# EAGLE board CAN_FB (EAGLE 4.09)
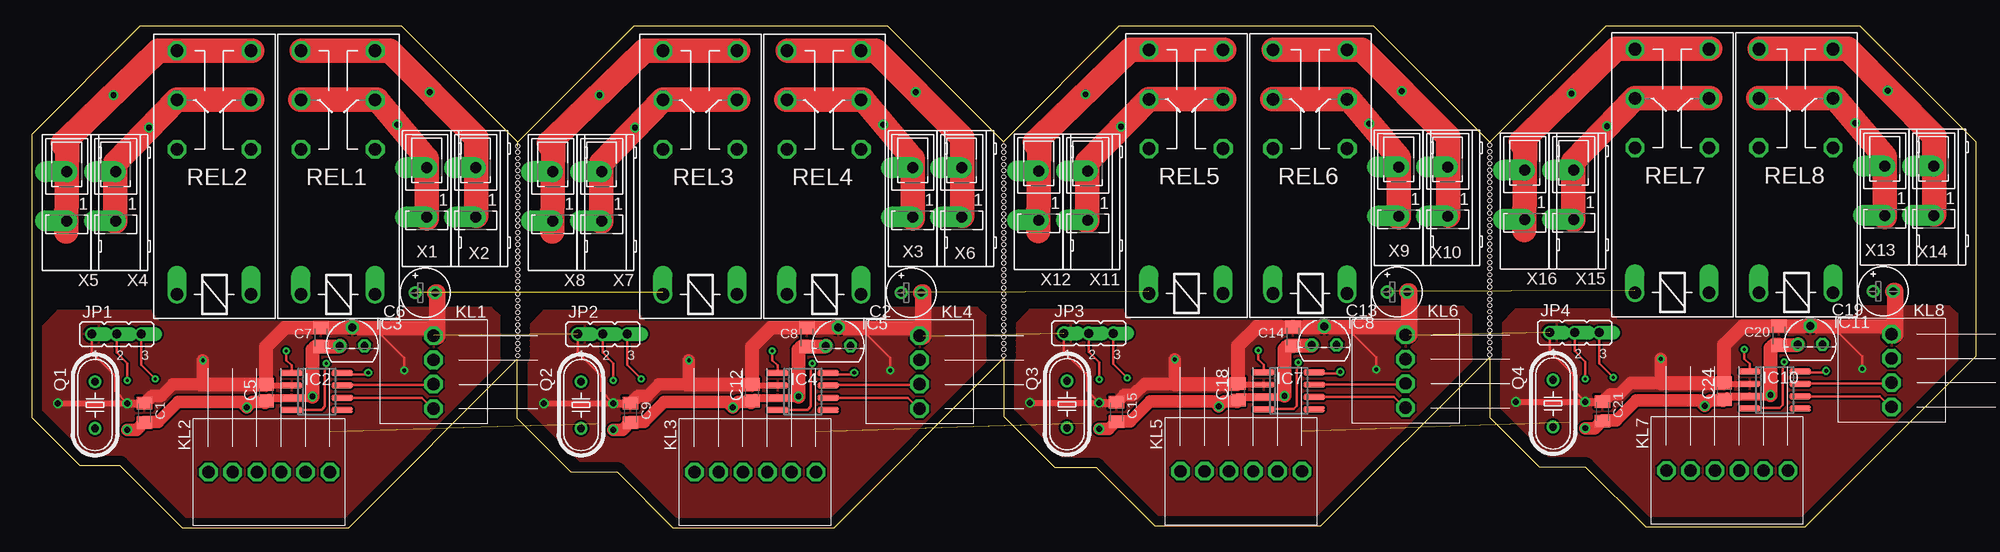
[diagram p0: board, top side]
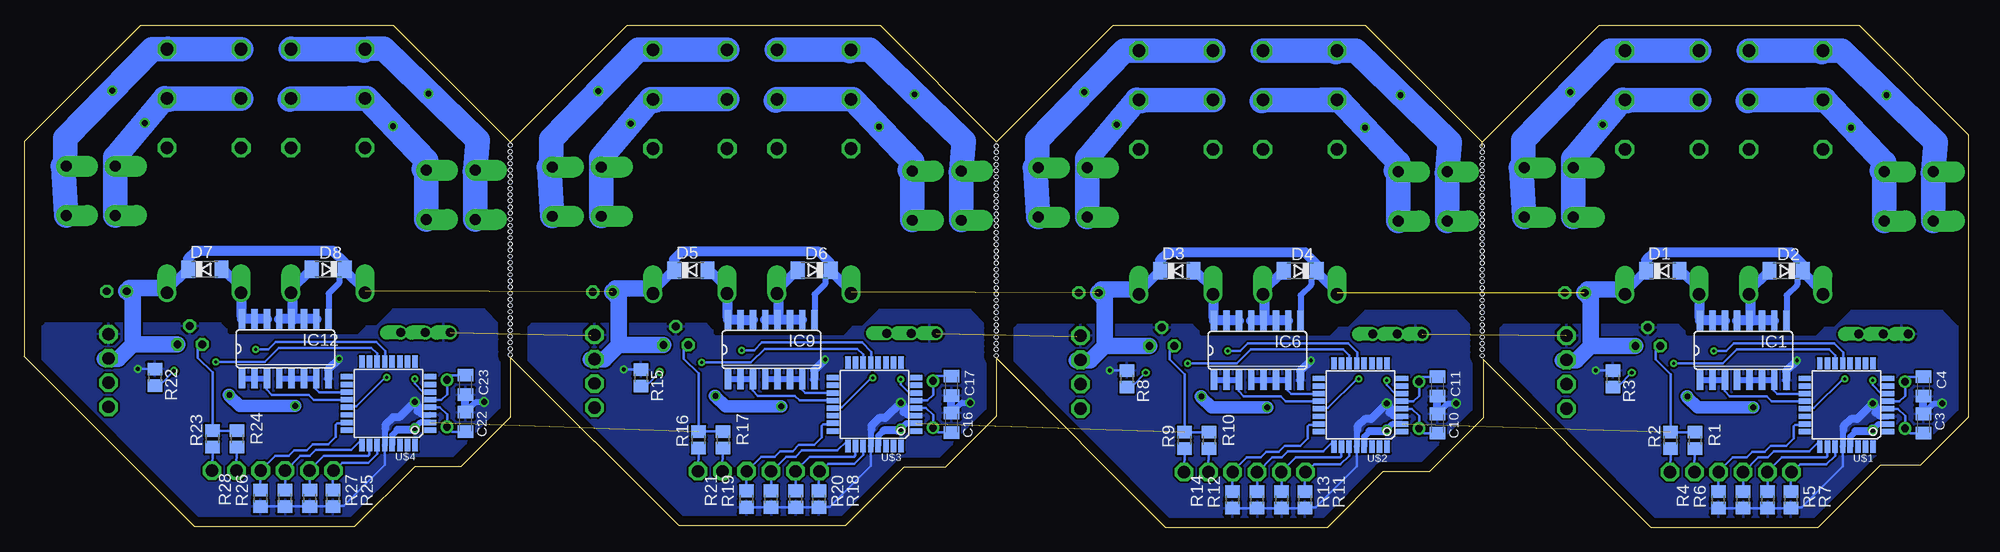
[diagram p1: board, bottom side, seen from below]

Size 200.03 x 51.67 mm. Coordinates in mm from the lower left corner, seen from the top.
Outline: 50.01,39.21 50.01,39.69 38.02,51.67 11.19,51.67 0,40.48 0,11.35 4.92,6.43 9.05,6.43 15.48,0
Outline: 50.01,39.69 61.99,51.67 88.03,51.67 100.01,39.69 100.01,39.77 111.92,51.67 138.03,51.67 150.02,39.69
Outline: 150.02,39.69 150.02,39.69
Outline: 150.02,39.69 162,51.67 188.12,51.67 200.03,39.77 200.03,17.62 182.48,0.08 166.05,0.08 159.86,6.27 155.1,6.27 150.02,11.35 150.02,17.54 132.64,0.16 115.57,0.16 109.54,6.19 105.25,6.19 100.01,11.43 100.01,17.46 82.55,0 65.96,0 60.25,5.71 55.48,5.71 49.93,11.27 49.93,17.3 32.62,0 15.48,0
Outline: 15.48,0 15.48,0
Copper layers used: Top, Bottom
Holes 0.41 mm at 50.01,26.59 50.01,25.96 50.01,27.23 50.01,27.86 50.01,28.5 50.01,29.13 50.01,29.77 50.01,30.4 50.01,31.04 50.01,31.67 50.01,32.94 50.01,32.31 50.01,33.58 50.01,34.21 50.01,34.85 50.01,35.48 50.01,36.12 50.01,36.75 50.01,37.39 50.01,38.02 50.01,39.29 50.01,38.66 50.01,18.34 50.01,18.97 50.01,20.24 50.01,19.61 50.01,20.88 50.01,21.51 50.01,22.15 50.01,22.78 50.01,23.42 50.01,24.05 50.01,24.69 50.01,25.32 100.01,26.59 100.01,25.96 100.01,27.23 100.01,27.86 100.01,28.5 100.01,29.13 100.01,29.77 100.01,30.4 100.01,31.04 100.01,31.67 100.01,32.94 100.01,32.31 100.01,33.58 100.01,34.21 100.01,34.85 100.01,35.48 100.01,36.12 100.01,36.75 100.01,37.39 100.01,38.02 100.01,39.29 100.01,38.66 100.01,18.34 100.01,18.97 100.01,20.24 100.01,19.61 100.01,20.88 100.01,21.51 100.01,22.15 100.01,22.78 100.01,23.42 100.01,24.05 100.01,24.69 100.01,25.32 150.02,26.67 150.02,26.04 150.02,27.3 150.02,27.94 150.02,28.57 150.02,29.21 150.02,29.84 150.02,30.48 150.02,31.11 150.02,31.75 150.02,33.02 150.02,32.38 150.02,33.66 150.02,34.29 150.02,34.92 150.02,35.56 150.02,36.2 150.02,36.83 150.02,37.47 150.02,38.1 150.02,39.37 150.02,38.73 150.02,17.78 150.02,18.41 150.02,19.05 150.02,20.32 150.02,19.68 150.02,20.95 150.02,21.59 150.02,22.23 150.02,22.86 150.02,23.5 150.02,24.13 150.02,24.77 150.02,25.4 50.01,17.7 100.01,17.7

## Footprints (pad centres in the part's own frame; a part is rotated, then mirrored left to right if it is on the bottom)
C0805K = smd 1.3 x 1.6: 1 -1,0; 2 1,0
E2-5 = drill 0.813 pad 1.27 round: + -1.016,0 | drill 0.813 pad 1.27 octagon: - 1.016,0
C0805 = smd 1.3 x 1.5: 1 -0.85,0; 2 0.85,0
SOD80C = smd 1.4 x 1.8: A 1.7,0; C -1.7,0
SO16 = smd 0.66 x 2.032: 1 -4.445,-3.073; 2 -3.175,-3.073; 3 -1.905,-3.073; 4 -0.635,-3.073; 5 0.635,-3.073; 6 1.905,-3.073; 7 3.175,-3.073; 8 4.445,-3.073; 9 4.445,3.073; 10 3.175,3.073; 11 1.905,3.073; 12 0.635,3.073; 13 -0.635,3.073; 14 -1.905,3.073; 15 -3.175,3.073; 16 -4.445,3.073
SO8 = smd 0.6 x 2.2: 1 -1.905,-2.6; 2 -0.635,-2.6; 3 0.635,-2.6; 4 1.905,-2.6; 5 1.905,2.6; 6 0.635,2.6; 7 -0.635,2.6; 8 -1.905,2.6
TO92 = drill 0.813 octagon: 1 -1.27,0; 2 0,1.905; 3 1.27,0
JP2 = drill 0.914 offset: 1 -2.54,0; 2 0,0; 3 2.54,0
AST021-04 = drill 1.27 octagon: P$1 0,0; P$2 0,2.5; P$3 0,5; P$4 0,7.5
AST021-06 = drill 1.27 octagon: P$1 0,0; P$2 0,2.5; P$3 0,5; P$4 0,7.5; P$5 0,10; P$6 0,12.5
HC49U-V = drill 0.813 round: 1 -2.413,0; 2 2.413,0
R0805 = smd 1.3 x 1.5: 1 -0.85,0; 2 0.85,0
FIN41 = drill 1.3 offset: 1 -10.16,3.81; 2 -10.16,-3.81 | drill 1.3 octagon: O1 4.763,-3.81; O2 4.763,3.81; P1 9.842,-3.81; P2 9.842,3.81; S1 14.922,-3.81; S2 14.922,3.81
LQFP32 = smd 1.27 x 0.559: 1 -4.293,2.743; 2 -4.293,1.956; 3 -4.293,1.168; 4 -4.293,0.381; 5 -4.293,-0.381; 6 -4.293,-1.168; 7 -4.293,-1.956; 8 -4.293,-2.743; 17 4.293,-2.743; 18 4.293,-1.956; 19 4.293,-1.168; 20 4.293,-0.381; 21 4.293,0.381; 22 4.293,1.168; 23 4.293,1.956; 24 4.293,2.743 | smd 0.559 x 1.27: 9 -2.743,-4.293; 10 -1.956,-4.293; 11 -1.168,-4.293; 12 -0.381,-4.293; 13 0.381,-4.293; 14 1.168,-4.293; 15 1.956,-4.293; 16 2.743,-4.293; 25 2.743,4.293; 26 1.956,4.293; 27 1.168,4.293; 28 0.381,4.293; 29 -0.381,4.293; 30 -1.168,4.293; 31 -1.956,4.293; 32 -2.743,4.293
W236-1 = drill 1.118 pad 2.184 offset: 1 0,-2.54; 2 0,2.54

## Placement (x,y rotation side)
C1  100nF  [C0805K]  11.59,11.82 90 top
C2  47µF / 25V  [E2-5]  90.5,24.18 0 top
C3  1pF  [C0805K]  4.61,10.71 270 bottom
C4  1pF  [C0805K]  4.61,14.52 90 bottom
C5  100nF  [C0805]  24.13,13.89 90 top
C6  47µF / 25V  [E2-5]  40.49,24.18 0 top
C7  100nF / 10V  [C0805K]  29.76,19.6 90 top
C8  100nF / 10V  [C0805K]  79.77,19.6 90 top
C9  100nF  [C0805K]  61.6,11.82 90 top
C10  1pF  [C0805K]  54.62,10.71 270 bottom
C11  1pF  [C0805K]  54.62,14.52 90 bottom
C12  100nF  [C0805]  74.14,13.89 90 top
C13  47µF / 25V  [E2-5]  140.5,24.26 0 top
C14  100nF / 10V  [C0805K]  129.77,19.68 90 top
C15  100nF  [C0805K]  111.61,11.9 90 top
C16  1pF  [C0805K]  104.62,10.79 270 bottom
C17  1pF  [C0805K]  104.62,14.6 90 bottom
C18  100nF  [C0805]  124.14,13.97 90 top
C19  47µF / 25V  [E2-5]  190.51,24.34 0 top
C20  100nF / 10V  [C0805K]  179.78,19.76 90 top
C21  100nF  [C0805K]  161.61,11.98 90 top
C22  1pF  [C0805K]  154.63,10.87 270 bottom
C23  1pF  [C0805K]  154.63,14.68 90 bottom
C24  100nF  [C0805]  174.15,14.05 90 top
D1  1N4148  [SOD80C]  31.43,26.43 0 bottom
D2  1N4148  [SOD80C]  18.73,26.43 180 bottom
D3  1N4148  [SOD80C]  81.44,26.43 0 bottom
D4  1N4148  [SOD80C]  68.74,26.43 180 bottom
D5  1N4148  [SOD80C]  131.45,26.51 0 bottom
D6  1N4148  [SOD80C]  118.75,26.51 180 bottom
D7  1N4148  [SOD80C]  181.45,26.59 0 bottom
D8  1N4148  [SOD80C]  168.75,26.59 180 bottom
IC1  ULN2003AD  [SO16]  23.14,18.25 0 bottom
IC2  PCA82C250T  [SO8]  29.34,14.01 270 top
IC3  7805L  [TO92]  32.97,18.71 0 top
IC4  PCA82C250T  [SO8]  79.35,14.01 270 top
IC5  7805L  [TO92]  82.98,18.71 0 top
IC6  ULN2003AD  [SO16]  73.15,18.25 0 bottom
IC7  PCA82C250T  [SO8]  129.35,14.09 270 top
IC8  7805L  [TO92]  132.99,18.79 0 top
IC9  ULN2003AD  [SO16]  123.15,18.33 0 bottom
IC10  PCA82C250T  [SO8]  179.36,14.16 270 top
IC11  7805L  [TO92]  182.99,18.87 0 top
IC12  ULN2003AD  [SO16]  173.16,18.41 0 bottom
JP1  [JP2]  8.73,19.92 0 top
JP2  [JP2]  58.74,19.92 0 top
JP3  [JP2]  108.74,20 0 top
JP4  [JP2]  158.75,20.08 0 top
KL1  AST021-04  [AST021-04]  41.35,19.76 180 top
KL2  AST021-06  [AST021-06]  18.18,5.71 270 top
KL3  AST021-06  [AST021-06]  68.18,5.71 270 top
KL4  AST021-04  [AST021-04]  91.36,19.76 180 top
KL5  AST021-06  [AST021-06]  118.19,5.79 270 top
KL6  AST021-04  [AST021-04]  141.37,19.84 180 top
KL7  AST021-06  [AST021-06]  168.2,5.87 270 top
KL8  AST021-04  [AST021-04]  191.37,19.92 180 top
Q1  6.00000  [HC49U-V]  6.51,12.62 270 top
Q2  6.00000  [HC49U-V]  56.52,12.62 270 top
Q3  6.00000  [HC49U-V]  106.53,12.7 270 top
Q4  6.00000  [HC49U-V]  156.53,12.78 270 top
R1  1k  [R0805]  28.1,8.97 90 bottom
R2  1k  [R0805]  30.64,8.97 90 bottom
R3  [R0805]  36.56,15.32 90 bottom
R4  100k  [R0805]  25.72,2.86 90 bottom
R5  100k  [R0805]  23.18,2.86 90 bottom
R6  100k  [R0805]  20.64,2.86 90 bottom
R7  100k  [R0805]  18.26,2.86 90 bottom
R8  [R0805]  86.57,15.32 90 bottom
R9  1k  [R0805]  80.65,8.97 90 bottom
R10  1k  [R0805]  78.11,8.97 90 bottom
R11  100k  [R0805]  68.26,2.86 90 bottom
R12  100k  [R0805]  70.64,2.86 90 bottom
R13  100k  [R0805]  73.18,2.86 90 bottom
R14  100k  [R0805]  75.72,2.86 90 bottom
R15  [R0805]  136.58,15.4 90 bottom
R16  1k  [R0805]  130.65,9.05 90 bottom
R17  1k  [R0805]  128.11,9.05 90 bottom
R18  100k  [R0805]  118.27,2.94 90 bottom
R19  100k  [R0805]  120.65,2.94 90 bottom
R20  100k  [R0805]  123.19,2.94 90 bottom
R21  100k  [R0805]  125.73,2.94 90 bottom
R22  [R0805]  186.58,15.48 90 bottom
R23  1k  [R0805]  180.66,9.13 90 bottom
R24  1k  [R0805]  178.12,9.13 90 bottom
R25  100k  [R0805]  168.28,3.02 90 bottom
R26  100k  [R0805]  170.66,3.02 90 bottom
R27  100k  [R0805]  173.2,3.02 90 bottom
R28  100k  [R0805]  175.74,3.02 90 bottom
REL1  FIN41.61  [FIN41]  31.52,34.19 90 top
REL2  FIN41.61  [FIN41]  18.76,34.19 90 top
REL3  FIN41.61  [FIN41]  68.76,34.19 90 top
REL4  FIN41.61  [FIN41]  81.52,34.19 90 top
REL5  FIN41.61  [FIN41]  118.77,34.27 90 top
REL6  FIN41.61  [FIN41]  131.53,34.27 90 top
REL7  FIN41.61  [FIN41]  168.78,34.35 90 top
REL8  FIN41.61  [FIN41]  181.53,34.35 90 top
U$1  MC9S08DZ16CLC  [LQFP32]  12.54,12.62 180 bottom
U$2  MC9S08DZ16CLC  [LQFP32]  62.54,12.62 180 bottom
U$3  MC9S08DZ16CLC  [LQFP32]  112.55,12.7 180 bottom
U$4  MC9S08DZ16CLC  [LQFP32]  162.55,12.78 180 bottom
X1  W236-1  [W236-1]  40.65,34.52 180 top
X2  W236-1  [W236-1]  45.68,34.52 180 top
X3  W236-1  [W236-1]  90.65,34.52 180 top
X4  W236-1  [W236-1]  8.64,34.11 180 top
X5  W236-1  [W236-1]  3.6,34.11 180 top
X6  W236-1  [W236-1]  95.69,34.52 180 top
X7  W236-1  [W236-1]  58.64,34.11 180 top
X8  W236-1  [W236-1]  53.61,34.11 180 top
X9  W236-1  [W236-1]  140.66,34.6 180 top
X10  W236-1  [W236-1]  145.69,34.6 180 top
X11  W236-1  [W236-1]  108.65,34.19 180 top
X12  W236-1  [W236-1]  103.62,34.19 180 top
X13  W236-1  [W236-1]  190.67,34.68 180 top
X14  W236-1  [W236-1]  195.7,34.68 180 top
X15  W236-1  [W236-1]  158.66,34.27 180 top
X16  W236-1  [W236-1]  153.62,34.27 180 top

## Library data of the parts
C1-C24 R1-R28 = rcl
D1-D8 = diode
IC1 IC6 IC9 IC12 = uln-udn
IC2 IC4 IC7 IC10 = micro-philips
IC3 IC5 IC8 IC11 = linear
JP1-JP4 = jumper
KL1-KL8 = con-ria
Q1-Q4 = crystal
REL1-REL8 = relay
U$1-U$4 = MC9S08DZ16CLC
X1-X16 = con-wago-508

## Nets
+5V: C1.1 C5.1 C7.1 C8.1 C9.1 C12.1 C14.1 C15.1 C18.1 C20.1 C21.1 C24.1 IC2.3 IC3.1 IC4.3 IC5.1 IC7.3 IC8.1 IC10.3 IC11.1 R1.2 R2.2 R9.2 R10.2 R16.2 R17.2 R23.2 R24.2 U$1.2 U$1.29 U$2.2 U$2.29 U$3.2 U$3.29 U$4.2 U$4.29
+12V: C2.+ C6.+ C13.+ C19.+ D1.C D2.C D3.C D4.C D5.C D6.C D7.C D8.C IC1.9 IC3.3 IC5.3 IC6.9 IC8.3 IC9.9 IC11.3 IC12.9 KL1.P$2 KL4.P$2 KL6.P$2 KL8.P$2 REL1.2 REL2.1 REL3.1 REL4.2 REL5.1 REL6.2 REL7.1 REL8.2
GND: C1.2 C2.- C3.1 C4.1 C5.2 C6.- C7.2 C8.2 C9.2 C10.1 C11.1 C12.2 C13.- C14.2 C15.2 C16.1 C17.1 C18.2 C19.- C20.2 C21.2 C22.1 C23.1 C24.2 IC1.8 IC2.2 IC3.2 IC4.2 IC5.2 IC6.8 IC7.2 IC8.2 IC9.8 IC10.2 IC11.2 IC12.8 JP1.1 JP2.1 JP3.1 JP4.1 KL1.P$1 KL4.P$1 KL6.P$1 KL8.P$1 R3.2 R4.1 R5.1 R6.1 R7.1 R8.2 R11.1 R12.1 R13.1 R14.1 R15.2 R18.1 R19.1 R20.1 R21.1 R22.2 R25.1 R26.1 R27.1 R28.1 U$1.3 U$1.28 U$2.3 U$2.28 U$3.3 U$3.28 U$4.3 U$4.28
N$1: IC2.1 U$1.13
N$2: IC2.4 U$1.14
N$3: IC2.8 R3.1
N$4: IC2.6 KL1.P$4
N$5: KL2.P$5 R1.1
N$6: D1.A IC1.14 IC1.15 IC1.16 REL1.1
N$7: IC2.7 KL1.P$3
N$8: D2.A IC1.10 IC1.11 IC1.12 IC1.13 REL2.2
N$9: C4.2 Q1.1 U$1.5
N$10: C3.2 Q1.2 U$1.4
N$11: IC1.1 IC1.2 IC1.3 U$1.20
N$12: IC1.4 IC1.5 IC1.6 IC1.7 U$1.19
N$13: KL2.P$4 R4.2 U$1.23
N$14: KL2.P$3 R5.2 U$1.25
N$15: KL2.P$2 R6.2 U$1.26
N$16: REL1.S1 REL1.S2 X2.1 X2.2
N$17: KL2.P$1 R7.2 U$1.27
N$18: REL1.P1 REL1.P2 X1.1 X1.2
N$19: KL2.P$6 R2.1
N$20: IC4.1 U$2.13
N$21: JP1.2 U$1.6
N$22: JP1.3 U$1.21
N$23: IC4.4 U$2.14
N$24: IC4.8 R8.1
N$25: REL2.P1 REL2.P2 X4.1 X4.2
N$26: REL2.S1 REL2.S2 X5.1 X5.2
N$27: IC4.7 KL4.P$3
N$28: IC4.6 KL4.P$4
N$29: C11.2 Q2.1 U$2.5
N$30: C10.2 Q2.2 U$2.4
N$31: IC6.1 IC6.2 IC6.3 U$2.20
N$32: IC6.4 IC6.5 IC6.6 IC6.7 U$2.19
N$33: REL4.S1 REL4.S2 X6.1 X6.2
N$34: REL4.P1 REL4.P2 X3.1 X3.2
N$35: REL3.P1 REL3.P2 X7.1 X7.2
N$36: REL3.S1 REL3.S2 X8.1 X8.2
N$37: D3.A IC6.14 IC6.15 IC6.16 REL4.1
N$38: D4.A IC6.10 IC6.11 IC6.12 IC6.13 REL3.2
N$39: KL3.P$4 R14.2 U$2.23
N$40: KL3.P$3 R13.2 U$2.25
N$41: KL3.P$2 R12.2 U$2.26
N$42: KL3.P$1 R11.2 U$2.27
N$43: KL3.P$5 R10.1
N$44: KL3.P$6 R9.1
N$45: JP2.2 U$2.6
N$46: JP2.3 U$2.21
N$47: IC7.1 U$3.13
N$48: IC7.4 U$3.14
N$49: IC7.8 R15.1
N$50: IC7.7 KL6.P$3
N$51: IC7.6 KL6.P$4
N$52: C17.2 Q3.1 U$3.5
N$53: C16.2 Q3.2 U$3.4
N$54: IC9.1 IC9.2 IC9.3 U$3.20
N$55: IC9.4 IC9.5 IC9.6 IC9.7 U$3.19
N$56: REL6.S1 REL6.S2 X10.1 X10.2
N$57: REL6.P1 REL6.P2 X9.1 X9.2
N$58: REL5.P1 REL5.P2 X11.1 X11.2
N$59: REL5.S1 REL5.S2 X12.1 X12.2
N$60: D5.A IC9.14 IC9.15 IC9.16 REL6.1
N$61: D6.A IC9.10 IC9.11 IC9.12 IC9.13 REL5.2
N$62: KL5.P$4 R21.2 U$3.23
N$63: KL5.P$3 R20.2 U$3.25
N$64: KL5.P$2 R19.2 U$3.26
N$65: KL5.P$1 R18.2 U$3.27
N$66: KL5.P$5 R17.1
N$67: KL5.P$6 R16.1
N$68: JP3.2 U$3.6
N$69: JP3.3 U$3.21
N$70: IC10.1 U$4.13
N$71: IC10.4 U$4.14
N$72: IC10.8 R22.1
N$73: IC10.7 KL8.P$3
N$74: IC10.6 KL8.P$4
N$75: C23.2 Q4.1 U$4.5
N$76: C22.2 Q4.2 U$4.4
N$77: IC12.1 IC12.2 IC12.3 U$4.20
N$78: IC12.4 IC12.5 IC12.6 IC12.7 U$4.19
N$79: REL8.S1 REL8.S2 X14.1 X14.2
N$80: REL8.P1 REL8.P2 X13.1 X13.2
N$81: REL7.P1 REL7.P2 X15.1 X15.2
N$82: REL7.S1 REL7.S2 X16.1 X16.2
N$83: D7.A IC12.14 IC12.15 IC12.16 REL8.1
N$84: D8.A IC12.10 IC12.11 IC12.12 IC12.13 REL7.2
N$85: KL7.P$4 R28.2 U$4.23
N$86: KL7.P$3 R27.2 U$4.25
N$87: KL7.P$2 R26.2 U$4.26
N$88: KL7.P$1 R25.2 U$4.27
N$89: KL7.P$5 R24.1
N$90: KL7.P$6 R23.1
N$91: JP4.2 U$4.6
N$92: JP4.3 U$4.21

## Tracks (layer width: path | path; a pad name or v marks a point on that pad's centre or on a via)
+5V  (via drill 0.61)  (3 unrouted)
  Top 0.61: 24.4,13.37 24.13,13.1 C5.1 | 74.41,13.37 74.14,13.1 C12.1 | 124.42,13.45 124.14,13.18 C18.1 | 174.42,13.53 174.15,13.26 C24.1
  Top 0.813: 24.4,13.37 IC2.3 28.89,13.37 28.89,13.41 | 74.41,13.37 IC4.3 78.9,13.37 78.9,13.41 | 124.42,13.45 IC7.3 128.91,13.45 128.91,13.49 | 174.42,13.53 IC10.3 178.91,13.53 178.91,13.57
  Top 1.27: 11.59,10.87 10.79,10.08 v9.84,10.08 | 11.59,10.87 C1.1 | 11.59,10.87 13.01,10.87 15.08,12.94 17.46,12.94 21.59,12.94 v22.15,12.38 22.7,12.94 24.03,12.94 | 28.89,13.41 v28.89,13.49 | 28.89,18.26 28.81,18.34 | 61.6,10.87 61.59,10.87 60.8,10.08 v59.85,10.08 | 61.6,10.87 C9.1 | 61.6,10.87 63.02,10.87 65.09,12.94 67.47,12.94 | 67.47,12.94 | 67.47,12.94 71.6,12.94 v72.15,12.38 72.71,12.94 74.03,12.94 | 78.9,13.41 v78.9,13.49 | 78.9,18.26 78.82,18.34 | 111.61,10.95 111.6,10.95 110.81,10.16 v109.86,10.16 | 111.61,10.95 C15.1 | 111.61,10.95 113.03,10.95 115.09,13.02 117.47,13.02 121.6,13.02 v122.16,12.46 122.71,13.02 124.04,13.02 | 128.91,13.49 v128.91,13.57 | 128.91,18.34 128.83,18.41 | 161.61,11.03 160.81,10.24 v159.86,10.24 | 161.61,11.03 C21.1 | 161.61,11.03 163.03,11.03 165.1,13.1 167.48,13.1 | 167.48,13.1 | 167.48,13.1 171.61,13.1 v172.16,12.54 172.72,13.1 174.05,13.1 | 178.91,13.57 v178.91,13.65 | 178.91,18.41 178.83,18.49
  Top 1.422: 24.03,12.94 C5.1 | v28.89,13.49 28.89,18.26 29.29,18.65 29.77,18.65 | 29.77,18.65 C7.1 | IC3.1 31.7,18.68 31.67,18.65 29.77,18.65 | 74.03,12.94 C12.1 | v78.9,13.49 78.9,18.26 79.3,18.65 79.77,18.65 | 79.77,18.65 C8.1 | IC5.1 81.71,18.68 81.68,18.65 79.77,18.65 | 124.04,13.02 C18.1 | v128.91,13.57 128.91,18.34 129.3,18.73 129.78,18.73 | 129.78,18.73 C14.1 | IC8.1 131.72,18.77 131.68,18.73 129.78,18.73 | 174.05,13.1 C24.1 | v178.91,13.65 178.91,18.41 179.31,18.81 179.78,18.81 | 179.78,18.81 C20.1 | IC11.1 181.72,18.84 181.69,18.81 179.78,18.81
  Bottom 0.254: 30.64,9.84 | 30.64,9.84 R2.2 | 30.64,9.84 30.62,9.82 R1.2 R2.2 | R2.2 30.64,15.8 32.15,17.3 32.15,18.65 32.18,18.68 IC3.1 | 80.64,9.84 | 80.64,9.84 R9.2 | 80.64,9.84 80.62,9.82 R10.2 R9.2 | R9.2 80.64,15.8 82.15,17.3 82.15,18.65 82.19,18.68 IC5.1 | 130.65,9.92 | 130.65,9.92 R16.2 | 130.65,9.92 130.63,9.9 R17.2 R16.2 | R16.2 130.65,15.88 132.16,17.38 132.16,18.73 132.19,18.77 IC8.1 | 180.66,10 | 180.66,10 R23.2 | 180.66,10 180.63,9.98 R24.2 R23.2 | R23.2 180.66,15.95 182.17,17.46 182.17,18.81 182.2,18.84 IC11.1
  Bottom 0.61: U$1.2 9.26,10.66 v9.84,10.08 | U$1.29 12.15,9.36 11.59,9.92 | U$2.2 59.27,10.66 v59.85,10.08 | U$2.29 62.16,9.36 61.59,9.92 | U$3.2 109.28,10.74 v109.86,10.16 | U$3.29 112.17,9.44 111.6,10 | U$4.2 159.28,10.82 v159.86,10.24 | U$4.29 162.17,9.52 161.61,10.08
  Bottom 0.813: 11.59,9.92 10.16,9.92 9.84,10.24 v9.84,10.08 | 61.59,9.92 60.17,9.92 59.85,10.24 v59.85,10.08 | 111.6,10 110.17,10 109.86,10.32 v109.86,10.16 | 161.61,10.08 160.18,10.08 159.86,10.4 v159.86,10.24
  Bottom 1.27: v22.15,12.38 27.86,12.38 28.89,13.41 | v28.89,13.49 28.97,13.49 | v72.15,12.38 77.87,12.38 78.9,13.41 | v78.9,13.49 78.98,13.49 | v122.16,12.46 127.87,12.46 128.91,13.49 | v128.91,13.57 128.98,13.57 | v172.16,12.54 177.88,12.54 178.91,13.57 | v178.91,13.65 178.99,13.65
+12V  (3 unrouted)
  Bottom 0.254: 41.75,17.22 KL1.P$2 | 91.76,17.22 KL4.P$2 | 141.76,17.3 KL6.P$2 | 191.77,17.38 KL8.P$2
  Bottom 0.61: IC1.9 18.7,23.93 17.62,25 17.62,25.8 17.1,26.32 17.03,26.32 | 14.92,23.89 14.95,23.92 REL2.1 | IC6.9 68.7,23.93 67.63,25 67.63,25.8 67.11,26.32 67.04,26.32 | 64.93,23.89 64.95,23.92 REL3.1 | IC9.9 118.71,24.01 117.63,25.08 117.63,25.88 117.11,26.4 117.05,26.4 | 114.94,23.97 114.96,24 REL5.1 | IC12.9 168.71,24.09 167.64,25.16 167.64,25.96 167.12,26.48 167.05,26.48 | 164.94,24.05 164.97,24.08 REL7.1
  Bottom 1.016: REL1.2 35.33,24.29 33.18,26.43 | 33.18,26.43 D1.C | 33.18,26.43 33.18,27.54 32.38,28.34 18.26,28.34 17.03,27.11 D2.C 17.03,26.32 14.95,24.23 REL2.1 | REL4.2 85.33,24.29 83.19,26.43 | 83.19,26.43 D3.C | 83.19,26.43 83.19,27.54 82.39,28.34 68.26,28.34 67.04,27.11 D4.C 67.04,26.32 64.95,24.23 REL3.1 | REL6.2 135.34,24.36 133.19,26.51 | 133.19,26.51 D5.C | 133.19,26.51 133.19,27.62 132.4,28.42 118.27,28.42 117.05,27.19 D6.C 117.05,26.4 114.96,24.31 REL5.1 | REL8.2 185.34,24.44 183.2,26.59 | 183.2,26.59 D7.C | 183.2,26.59 183.2,27.7 182.4,28.5 168.28,28.5 167.05,27.27 D8.C 167.05,26.48 164.97,24.39 REL7.1
  Bottom 1.676: 35.83,24.53 35.57,24.53 35.33,24.29 | REL1.2 35.83,24.53 | 35.83,24.53 39.21,24.53 39.53,24.21 | 38.83,18.71 IC3.3 | 38.83,18.71 40.32,17.22 41.75,17.22 | 39.53,24.21 39.5,24.18 C6.+ | 38.83,18.71 38.83,23.51 39.53,24.21 | 85.83,24.53 85.57,24.53 85.33,24.29 | REL4.2 85.83,24.53 | 85.83,24.53 89.22,24.53 89.53,24.21 | 88.84,18.71 IC5.3 | 88.84,18.71 90.33,17.22 91.76,17.22 | 89.53,24.21 89.5,24.18 C2.+ | 88.84,18.71 88.84,23.51 89.53,24.21 | 135.84,24.61 135.58,24.61 135.34,24.36 | REL6.2 135.84,24.61 | 135.84,24.61 139.22,24.61 139.54,24.29 | 138.84,18.79 IC8.3 | 138.84,18.79 140.34,17.3 141.76,17.3 | 139.54,24.29 139.51,24.26 C13.+ | 138.84,18.79 138.84,23.59 139.54,24.29 | 185.84,24.69 185.59,24.69 185.34,24.44 | REL8.2 185.84,24.69 | 185.84,24.69 189.23,24.69 189.55,24.37 | 188.85,18.87 IC11.3 | 188.85,18.87 190.34,17.38 191.77,17.38 | 189.55,24.37 189.52,24.34 C19.+ | 188.85,18.87 188.85,23.67 189.55,24.37
GND  (via drill 0.41, 0.61)  (3 unrouted)
  Top 0.254: JP1.1 6.19,18.02 8.57,15.64 8.57,14.05 v9.84,12.78 | 33.5,20.56 33.42,20.64 35.16,20.64 38.34,17.46 v38.34,16.19 | JP2.1 56.2,18.02 58.58,15.64 58.58,14.05 v59.85,12.78 | 83.5,20.56 83.42,20.64 85.17,20.64 88.34,17.46 v88.34,16.19 | JP3.1 106.2,18.1 108.58,15.72 108.58,14.13 v109.86,12.86 | 133.51,20.64 133.43,20.72 135.18,20.72 138.35,17.54 v138.35,16.27 | JP4.1 156.21,18.18 158.59,15.8 158.59,14.21 v159.86,12.94 | 183.51,20.72 183.44,20.8 185.18,20.8 188.36,17.62 v188.36,16.35
  Top 0.61: IC2.2 24.17,14.64 24.13,14.68 C5.2 | v2.7,12.78 v9.84,12.78 | IC4.2 74.18,14.64 74.14,14.68 C12.2 | v52.7,12.78 v59.85,12.78 | IC7.2 124.19,14.72 124.14,14.76 C18.2 | v102.71,12.86 v109.86,12.86 | IC10.2 174.19,14.8 174.15,14.84 C24.2 | v152.72,12.94 v159.86,12.94
  Top 0.813: C1.2 11.59,12.78 v9.84,12.78 | C9.2 61.6,12.78 61.59,12.78 v59.85,12.78 | C15.2 111.61,12.86 111.6,12.86 v109.86,12.86 | C21.2 161.61,12.94 v159.86,12.94
  Top 1.27: v17.62,17.22 17.62,15 17.41,14.79 17.41,14.74 14.5,14.74 13.34,13.57 12.38,13.57 11.63,12.82 C1.2 | v67.63,17.22 67.63,15 67.41,14.79 67.41,14.74 64.51,14.74 63.34,13.57 62.39,13.57 61.64,12.82 C9.2 | v117.63,17.3 117.63,15.08 117.42,14.87 117.42,14.82 114.52,14.82 113.35,13.65 112.39,13.65 111.64,12.9 C15.2 | v167.64,17.38 167.64,15.16 167.43,14.95 167.43,14.9 164.52,14.9 163.35,13.73 162.4,13.73 161.65,12.98 C21.2
  Top 1.422: 17.41,14.74 C5.2 24.13,18.65 26.08,20.6 C7.2 33.45,20.6 | 33.45,20.6 33.45,20.61 IC3.2 | 33.45,20.6 33.5,20.56 40.88,20.56 41.75,19.68 | 67.41,14.74 C12.2 74.14,18.65 76.08,20.6 C8.2 83.46,20.6 | 83.46,20.6 83.45,20.61 IC5.2 | 83.46,20.6 83.5,20.56 90.89,20.56 91.76,19.68 | 117.42,14.82 C18.2 124.14,18.73 126.09,20.68 C14.2 133.47,20.68 | 133.47,20.68 133.46,20.68 IC8.2 | 133.47,20.68 133.51,20.64 140.89,20.64 141.76,19.76 | 167.43,14.9 C24.2 174.15,18.81 176.1,20.76 C20.2 183.47,20.76 | 183.47,20.76 IC11.2 | 183.47,20.76 183.51,20.72 190.9,20.72 191.77,19.84
  Top 1.676: C6.- 41.56,24.18 41.59,24.21 41.75,24.21 41.75,19.68 KL1.P$1 | C2.- 91.57,24.18 91.6,24.21 91.76,24.21 91.76,19.68 KL4.P$1 | C13.- 141.57,24.26 141.6,24.29 141.76,24.29 141.76,19.76 KL6.P$1 | C19.- 191.58,24.34 191.61,24.37 191.77,24.37 191.77,19.84 KL8.P$1
  Bottom 0.254: U$1.28 12.92,6.29 17.14,2.06 18.1,2.06 18.26,1.91 R7.1 20.58,2.01 20.64,2.06 R6.1 23.12,2.01 23.18,2.06 R5.1 25.66,2.01 25.72,2.06 | 25.72,2.06 | 25.72,2.06 R4.1 | R3.2 36.59,16.19 v38.34,16.19 | U$2.28 62.92,6.29 67.15,2.06 68.1,2.06 68.26,1.91 R11.1 70.59,2.01 70.64,2.06 | 70.64,2.06 | 70.64,2.06 R12.1 73.13,2.01 73.18,2.06 R13.1 75.67,2.01 75.72,2.06 | 75.72,2.06 | 75.72,2.06 R14.1 | R8.2 86.6,16.19 v88.34,16.19 | U$3.28 112.93,6.37 117.16,2.14 118.11,2.14 118.27,1.98 R18.1 120.59,2.09 120.65,2.14 | 120.65,2.14 | 120.65,2.14 R19.1 123.13,2.09 123.19,2.14 R20.1 125.67,2.09 125.73,2.14 | 125.73,2.14 | 125.73,2.14 R21.1 | R15.2 136.6,16.27 v138.35,16.27 | U$4.28 162.94,6.45 167.16,2.22 168.12,2.22 168.28,2.06 R25.1 170.6,2.17 170.66,2.22 | 170.66,2.22 | 170.66,2.22 R26.1 173.14,2.17 173.2,2.22 R27.1 175.68,2.17 175.74,2.22 R28.1 | R22.2 186.61,16.35 v188.36,16.35
  Bottom 0.61: IC1.8 18.72,15.18 18.73,15.16 | U$1.3 9.15,11.45 9.53,11.83 | U$1.28 12.92,10.02 12.86,10.08 | C3.1 3.54,12.78 v2.7,12.78 | IC6.8 68.72,15.18 68.74,15.16 | U$2.3 59.15,11.45 59.53,11.83 | U$2.28 62.92,10.02 62.87,10.08 | C10.1 53.55,12.78 v52.7,12.78 | IC9.8 118.73,15.25 118.75,15.24 | U$3.3 109.16,11.53 109.54,11.91 | U$3.28 112.93,10.1 112.87,10.16 | C16.1 103.56,12.86 v102.71,12.86 | IC12.8 168.74,15.33 168.75,15.32 | U$4.3 159.16,11.61 159.54,11.99 | U$4.28 162.94,10.18 162.88,10.24 | C22.1 153.56,12.94 v152.72,12.94
  Bottom 0.813: 4.6,13.41 4.61,13.41 C3.1 4.61,13.57 | 4.61,13.57 C4.1 | 4.61,13.57 4.6,13.57 | 9.53,11.83 9.53,12.46 v9.84,12.78 11.43,11.19 12.06,11.19 12.86,10.4 12.86,10.08 | 18.73,15.16 18.73,16.11 v17.62,17.22 | 54.61,13.41 54.62,13.41 C10.1 54.62,13.57 | 54.62,13.57 C11.1 | 54.62,13.57 54.61,13.57 | 59.53,11.83 59.53,12.46 v59.85,12.78 61.44,11.19 62.07,11.19 62.87,10.4 62.87,10.08 | 68.74,15.16 68.74,16.11 v67.63,17.22 | 104.62,13.49 C16.1 104.62,13.65 | 104.62,13.65 C17.1 | 104.62,13.65 | 109.54,11.91 109.54,12.54 v109.86,12.86 111.44,11.27 112.08,11.27 112.87,10.48 112.87,10.16 | 118.75,15.24 118.75,16.19 v117.63,17.3 | 154.62,13.57 154.63,13.57 C22.1 154.63,13.73 | 154.63,13.73 C23.1 | 154.63,13.73 154.62,13.73 | 159.54,11.99 159.54,12.62 v159.86,12.94 161.45,11.35 162.08,11.35 162.88,10.56 162.88,10.24 | 168.75,15.32 168.75,16.27 v167.64,17.38
  pour Bottom: 2.7,22.3 12.06,22.3 13.81,20.56 14.76,20.56 15.72,19.61 28.89,19.61 29.21,19.92 29.21,20.24 29.84,20.88 47.78,20.88 48.1,20.56 48.1,15.32 40.96,8.18 40.96,6.27 34.77,0.08 32.23,0.08 31.04,0 17.54,0 16.27,0 15.48,0 13.02,2.46 11.91,2.46 9.21,5.16 7.94,5.16 4.6,8.49 4.6,8.65 1.11,12.14 1.11,20.72
  pour Top: 1.11,20.72 2.7,22.3 12.22,22.3 12.22,22.15 13.18,21.19 36.99,21.19 38.42,22.62 47.31,22.62 48.1,21.83 48.1,15.32 40.96,8.18 40.96,6.11 40.8,6.11 34.77,0.08 15.4,0.08 15.24,0.24 15.24,0.24 13.18,2.3 13.02,2.3 12.86,2.46 11.75,2.46 11.75,2.62 9.21,5.16 7.94,5.16 7.94,5.32 1.11,12.14
  pour Bottom: 52.71,22.3 62.07,22.3 63.82,20.56 64.77,20.56 65.72,19.61 78.9,19.61 79.22,19.92 79.22,20.24 79.85,20.88 97.79,20.88 98.11,20.56 98.11,15.32 90.96,8.18 90.96,6.27 84.77,0.08 82.23,0.08 81.04,0 67.55,0 66.28,0 65.48,0 63.02,2.46 61.91,2.46 59.21,5.16 57.94,5.16 54.61,8.49 54.61,8.65 51.12,12.14 51.12,20.72
  pour Top: 51.12,20.72 52.71,22.3 62.23,22.3 62.23,22.15 63.18,21.19 87,21.19 88.42,22.62 97.31,22.62 98.11,21.83 98.11,15.32 90.96,8.18 90.96,6.11 90.81,6.11 84.77,0.08 65.41,0.08 65.25,0.24 65.25,0.24 63.18,2.3 63.02,2.3 62.87,2.46 61.75,2.46 61.75,2.62 59.21,5.16 57.94,5.16 57.94,5.32 51.12,12.14
  pour Bottom: 102.71,22.38 112.08,22.38 113.82,20.64 114.78,20.64 115.73,19.68 128.91,19.68 129.22,20 129.22,20.32 129.86,20.95 147.8,20.95 148.11,20.64 148.11,15.4 140.97,8.26 140.97,6.35 134.78,0.16 132.24,0.16 131.05,0.08 117.55,0.08 116.28,0.08 115.49,0.08 113.03,2.54 111.92,2.54 109.22,5.24 107.95,5.24 104.62,8.57 104.62,8.73 101.12,12.22 101.12,20.8
  pour Top: 101.12,20.8 102.71,22.38 112.24,22.38 112.24,22.23 113.19,21.27 137,21.27 138.43,22.7 147.32,22.7 148.11,21.91 148.11,15.4 140.97,8.26 140.97,6.19 140.81,6.19 134.78,0.16 115.41,0.16 115.25,0.32 115.25,0.32 113.19,2.38 113.03,2.38 112.87,2.54 111.76,2.54 111.76,2.7 109.22,5.24 107.95,5.24 107.95,5.4 101.12,12.22
  pour Bottom: 152.72,22.46 162.08,22.46 163.83,20.72 164.78,20.72 165.74,19.76 178.91,19.76 179.23,20.08 179.23,20.4 179.86,21.03 197.8,21.03 198.12,20.72 198.12,15.48 190.98,8.33 190.98,6.43 184.79,0.24 182.25,0.24 181.05,0.16 167.56,0.16 166.29,0.16 165.5,0.16 163.04,2.62 161.93,2.62 159.23,5.32 157.96,5.32 154.62,8.65 154.62,8.81 151.13,12.3 151.13,20.88
  pour Top: 151.13,20.88 152.72,22.46 162.24,22.46 162.24,22.3 163.2,21.35 187.01,21.35 188.44,22.78 197.33,22.78 198.12,21.99 198.12,15.48 190.98,8.33 190.98,6.27 190.82,6.27 184.78,0.24 165.42,0.24 165.26,0.4 165.26,0.4 163.2,2.46 163.04,2.46 162.88,2.62 161.77,2.62 161.77,2.78 159.23,5.32 157.96,5.32 157.96,5.48 151.13,12.3
N$1  (via drill 0.3)
  Top 0.254: IC2.1 26.74,16.68 26.19,17.22 v26.19,18.18
  Bottom 0.254: 13.02,16.91 | U$1.13 13.02,16.91 | 13.02,16.91 12.86,17.07 12.86,16.91 | v26.19,18.18 24.92,18.18 24.13,18.97 13.81,18.97 12.86,18.02 12.86,16.91 | 12.86,16.91
N$2  (via drill 0.3)
  Top 0.254: v30.32,16.91 30.32,16.43 30.16,16.27 30.16,12.46 29.84,12.14 26.67,12.14 26.71,12.1 IC2.4
  Bottom 0.254: v30.32,16.91 30.16,16.75 30.32,16.75 30.48,16.91 25.24,16.91 23.81,18.34 14.29,18.34 13.7,17.75 U$1.14
N$3  (via drill 0.41)
  Top 0.254: IC2.8 32.05,15.8 34.45,15.8 v34.61,15.95
  Bottom 0.254: R3.1 36.59,14.49 36.59,14.53 36.04,14.53 v34.61,15.95
N$4
  Top 0.254: KL1.P$4 41.32,12.26 41.27,12.22 40.13,13.37 IC2.6
N$5
  Bottom 0.254: R1.1 28.1,8.18 28.14,8.14 KL2.P$5
N$6
  Bottom 1.016: IC1.15 26.22,21.32 26.19,21.35 26.16,21.32 IC1.14 | IC1.15 26.32,21.23 26.35,21.19 26.48,21.32 IC1.16 | IC1.15 27.43,21.32 27.62,21.51 27.62,24.05 27.65,24.03 REL1.1 27.7,24.61 29.53,26.43 D1.A
N$7
  Top 0.254: KL1.P$3 41.43,14.69 41.43,14.68 31.98,14.68 IC2.7
N$8
  Bottom 1.016: IC1.10 IC1.11 | IC1.11 21.4,21.32 21.43,21.35 | IC1.11 22.35,21.32 22.38,21.35 22.41,21.32 IC1.12 23.62,21.32 23.65,21.35 23.68,21.32 IC1.13 | IC1.11 22.2,21.32 22.38,21.51 22.38,23.89 22.54,24.05 REL2.2 22.57,24.34 20.48,26.43 D2.A
N$9
  Bottom 0.254: U$1.5 7.08,13 6.51,13.57 6.51,15 6.51,15.01 Q1.1 6.51,15.15 6.15,15.52 C4.2
N$10
  Bottom 0.254: U$1.4 7.24,12.24 6.51,11.51 6.51,10.24 | 6.51,10.24 6.51,10.23 Q1.2 | C3.2 5.98,9.71 6.51,10.24
N$11
  Bottom 0.254: IC1.3 25.05,15.28 25.08,15.32 25.08,14.05 24.53,13.49 20.72,13.49 20.22,13 U$1.20
  Bottom 0.61: IC1.3 IC1.2 | IC1.2 26.34,15.18 26.35,15.16 | 27.61,15.18 IC1.1 | IC1.2 27.61,15.18 | 27.61,15.18 27.62,15.16
N$12
  Bottom 0.254: IC1.7 19.96,15.04 20,15 20,14.13 19.66,13.79 U$1.19
  Bottom 0.61: IC1.7 IC1.6 | IC1.6 21.26,15.18 21.27,15.16 | IC1.6 22.37,15.18 22.38,15.16 22.4,15.18 IC1.5 23.64,15.18 23.65,15.16 23.67,15.18 IC1.4
N$13
  Bottom 0.254: 16.83,10.71 16.83,10.72 | U$1.23 16.83,10.71 | 16.83,10.71 16.99,10.56 17.78,10.56 17.94,10.4 17.94,9.21 18.73,8.41 20.32,8.41 20.95,7.78 22.23,7.78 22.78,7.22 24.21,7.22 25.72,5.71 | KL2.P$4 25.72,5.64 25.72,5.71 | 25.72,5.71 R4.2 | 25.72,5.71
N$14
  Bottom 0.254: 15.28,7.82 U$1.25 15.28,8.69 15.4,8.81 16.35,7.86 20,7.86 20.64,7.22 21.59,7.22 23.18,5.64 | 23.18,5.64 KL2.P$3 | 23.18,5.64 23.26,5.64 23.18,5.56 R5.2
N$15
  Bottom 0.254: U$1.26 14.49,7.34 14.61,7.22 19.21,7.22 20.64,5.79 KL2.P$2 20.72,5.71 20.64,5.64 R6.2
N$16  (via drill 0.61)
  Top 1.422: v40.96,44.85 45.72,40.16
  Top 2.54: 27.78,49.13 36.83,49.13 45.72,40.16 45.72,32.07
  Bottom 1.422: 45.8,39.92 46.04,39.77 46.04,39.93 45.88,39.93 v40.96,44.85
  Bottom 2.54: REL1.S2 35.22,49.11 35.24,49.13 35.27,49.11 REL1.S1 36.85,49.11 45.8,39.92 45.8,37.23 | 45.8,37.23 46.03,37.06 X2.1 | X2.2 46,37.03 45.8,37.23
N$17
  Bottom 0.254: U$1.27 13.7,7.41 14.61,6.51 17.3,6.51 18.18,5.64 | 18.18,5.64 KL2.P$1 | 18.18,5.64 18.26,5.64 R7.2
N$18  (via drill 0.61)
  Top 1.422: 40.64,38.02 37.62,41.04 v37.62,41.51
  Top 2.54: 40.64,31.83 40.64,37.86 40.64,38.02 35.56,44.05 27.62,44.05
  Bottom 1.422: 40.65,38.01 40.64,38.02 40.64,38.5 v37.62,41.51
  Bottom 2.54: REL1.P2 34.95,44.03 35.08,43.89 35.22,44.03 REL1.P1 35.54,44.03 35.56,44.05 40.65,38.01 X1.1 | X1.1 | X1.1 X1.2
N$19
  Bottom 0.254: 30.74,8.12 30.8,8.18 | 30.74,8.12 R2.1 | KL2.P$6 30.64,8.02 30.74,8.12
N$20  (via drill 0.3)
  Top 0.254: IC4.1 76.75,16.68 76.2,17.22 v76.2,18.18
  Bottom 0.254: 63.02,16.91 | U$2.13 63.02,16.91 | 63.02,16.91 62.87,17.07 62.87,16.91 | v76.2,18.18 74.93,18.18 74.14,18.97 63.82,18.97 62.87,18.02 62.87,16.91 | 62.87,16.91
N$21  (via drill 0.3)
  Top 0.254: v9.84,15.16 9.84,16.91 8.73,18.02 JP1.2
  Bottom 0.254: U$1.6 8.94,13.79 9.84,14.68 v9.84,15.16
N$22  (via drill 0.3)
  Top 0.254: JP1.3 11.27,16.75 v12.7,15.32
  Bottom 0.254: U$1.21 16.83,12.14 16.67,12.3 15.88,12.3 12.86,15.32 v12.7,15.32
N$23  (via drill 0.3)
  Top 0.254: v80.33,16.91 80.33,16.43 80.17,16.27 80.17,12.46 79.85,12.14 76.68,12.14 76.72,12.1 IC4.4
  Bottom 0.254: v80.33,16.91 80.17,16.75 80.33,16.75 80.49,16.91 75.25,16.91 73.82,18.34 64.29,18.34 63.71,17.75 U$2.14
N$24  (via drill 0.41)
  Top 0.254: IC4.8 82.06,15.8 84.45,15.8 v84.61,15.95
  Bottom 0.254: R8.1 86.6,14.49 86.6,14.53 86.04,14.53 v84.61,15.95
N$25  (via drill 0.61)
  Top 1.422: v12.06,41.2 14.92,44.05 | v12.06,41.2
  Top 2.54: 8.57,37.54 8.57,31.51 | 8.57,37.54 | 8.57,37.54 14.92,44.05 22.7,44.05
  Bottom 1.422: REL2.P2 14.92,44.05 v12.06,41.2
  Bottom 2.54: 8.79,36.65 8.89,36.75 | 8.79,36.65 X4.1 8.64,37.61 14.76,44.05 16.51,44.05 REL2.P2 | X4.2 8.64,36.5 8.79,36.65 | REL2.P2 | REL2.P1 22.7,43.89 | REL2.P1 | REL2.P2 REL2.P1
N$26  (via drill 0.61)
  Top 1.422: 13.02,49.13 v8.41,44.53 | v8.41,44.53
  Top 2.54: 3.57,30.48 3.65,40.01 | 3.33,39.29 3.17,39.61 3.65,40.01 | 3.65,40.01 13.02,49.13 22.7,49.13 22.38,49.13
  Bottom 1.422: 13.02,49.13 13.02,48.97 12.86,48.97 v8.41,44.53 | 13.02,49.13
  Bottom 2.54: X5.1 X5.2 | X5.1 3.6,36.47 3.65,36.51 | X5.1 3.37,39.72 13.02,49.13 14.61,49.13 REL2.S2 | REL2.S2 15.08,48.97 | REL2.S2 22.52,49.11 22.54,49.13 REL2.S1
N$27
  Top 0.254: KL4.P$3 91.44,14.69 91.44,14.68 81.99,14.68 IC4.7
N$28
  Top 0.254: KL4.P$4 91.32,12.26 91.28,12.22 90.13,13.37 IC4.6
N$29
  Bottom 0.254: U$2.5 57.09,13 56.52,13.57 56.52,15 56.52,15.01 Q2.1 56.52,15.15 56.15,15.52 C11.2
N$30
  Bottom 0.254: U$2.4 57.24,12.24 56.52,11.51 56.52,10.24 | 56.52,10.24 56.52,10.23 Q2.2 | C10.2 55.99,9.71 56.52,10.24
N$31
  Bottom 0.254: IC6.3 75.05,15.28 75.09,15.32 75.09,14.05 74.53,13.49 70.72,13.49 70.23,13 U$2.20
  Bottom 0.61: IC6.3 IC6.2 | IC6.2 76.34,15.18 76.36,15.16 | 77.61,15.18 IC6.1 | IC6.2 77.61,15.18 | 77.61,15.18 77.63,15.16
N$32
  Bottom 0.254: IC6.7 69.97,15.04 70.01,15 70.01,14.13 69.67,13.79 U$2.19
  Bottom 0.61: IC6.7 IC6.6 | IC6.6 71.27,15.18 71.28,15.16 | IC6.6 72.38,15.18 72.39,15.16 72.4,15.18 IC6.5 73.65,15.18 73.66,15.16 73.67,15.18 IC6.4
N$33  (via drill 0.61)
  Top 1.422: v90.96,44.85 95.73,40.16
  Top 2.54: 77.79,49.13 86.84,49.13 95.73,40.16 95.73,32.07
  Bottom 1.422: 95.81,39.92 96.04,39.77 96.04,39.93 95.89,39.93 v90.96,44.85
  Bottom 2.54: REL4.S2 85.22,49.11 85.25,49.13 85.27,49.11 REL4.S1 86.86,49.11 95.81,39.92 95.81,37.23 | 95.81,37.23 96.03,37.06 X6.1 | X6.2 96,37.03 95.81,37.23
N$34  (via drill 0.61)
  Top 1.422: 90.65,38.02 87.63,41.04 v87.63,41.51
  Top 2.54: 90.65,31.83 90.65,37.86 90.65,38.02 85.57,44.05 77.63,44.05
  Bottom 1.422: 90.65,38.01 90.65,38.02 90.65,38.5 v87.63,41.51
  Bottom 2.54: REL4.P2 84.95,44.03 85.09,43.89 85.22,44.03 REL4.P1 85.54,44.03 85.57,44.05 90.65,38.01 X3.1 | X3.1 | X3.2 X3.1
N$35  (via drill 0.61)
  Top 1.422: 64.93,44.05 v62.07,41.2
  Top 2.54: 58.58,37.54 58.58,31.51 | 58.58,37.54 | 58.58,37.54 64.93,44.05 72.71,44.05
  Bottom 1.422: REL3.P2 64.93,44.05 v62.07,41.2
  Bottom 2.54: 58.79,36.65 58.9,36.75 | 58.79,36.65 X7.1 58.64,37.61 64.77,44.05 66.52,44.05 REL3.P2 | X7.2 58.64,36.5 58.79,36.65 | REL3.P2 | REL3.P1 72.71,43.89 | REL3.P1 | REL3.P2 REL3.P1
N$36  (via drill 0.61)
  Top 1.422: 63.02,49.13 v58.42,44.53 | v58.42,44.53
  Top 2.54: 53.58,30.48 53.66,40.01 | 53.34,39.29 53.18,39.61 53.66,40.01 | 53.66,40.01 63.02,49.13 72.71,49.13 72.39,49.13
  Bottom 1.422: 63.02,49.13 63.02,48.97 62.87,48.97 v58.42,44.53 | 63.02,49.13
  Bottom 2.54: X8.1 X8.2 | X8.1 53.61,36.47 53.66,36.51 | X8.1 53.37,39.72 63.02,49.13 64.61,49.13 REL3.S2 | REL3.S2 65.09,48.97 | REL3.S2 72.53,49.11 72.55,49.13 REL3.S1
N$37
  Bottom 1.016: IC6.15 76.23,21.32 76.2,21.35 76.17,21.32 IC6.14 | IC6.15 76.32,21.23 76.36,21.19 76.49,21.32 IC6.16 | IC6.15 77.44,21.32 77.63,21.51 77.63,24.05 77.65,24.03 REL4.1 77.71,24.61 79.53,26.43 D3.A
N$38
  Bottom 1.016: IC6.10 IC6.11 | IC6.11 71.41,21.32 71.44,21.35 | IC6.11 72.36,21.32 72.39,21.35 72.42,21.32 IC6.12 73.63,21.32 73.66,21.35 73.69,21.32 IC6.13 | IC6.11 72.2,21.32 72.39,21.51 72.39,23.89 72.55,24.05 REL3.2 72.57,24.34 70.48,26.43 D4.A
N$39
  Bottom 0.254: 66.83,10.71 66.83,10.72 | 66.83,10.71 U$2.23 | 66.83,10.71 66.99,10.56 67.79,10.56 67.94,10.4 67.94,9.21 68.74,8.41 70.33,8.41 70.96,7.78 72.23,7.78 72.79,7.22 74.22,7.22 75.72,5.71 | KL3.P$4 75.72,5.64 75.72,5.71 | 75.72,5.71 R14.2 | 75.72,5.71
N$40
  Bottom 0.254: 65.28,7.82 U$2.25 65.28,8.69 65.41,8.81 66.36,7.86 70.01,7.86 70.64,7.22 71.6,7.22 73.18,5.64 | 73.18,5.64 KL3.P$3 | 73.18,5.64 73.26,5.64 73.18,5.56 R13.2
N$41
  Bottom 0.254: U$2.26 64.5,7.34 64.61,7.22 69.22,7.22 70.64,5.79 KL3.P$2 70.72,5.71 70.64,5.64 R12.2
N$42
  Bottom 0.254: U$2.27 63.71,7.41 64.61,6.51 67.31,6.51 68.18,5.64 | 68.18,5.64 KL3.P$1 | 68.18,5.64 68.26,5.64 R11.2
N$43
  Bottom 0.254: R10.1 78.11,8.18 78.14,8.14 KL3.P$5
N$44
  Bottom 0.254: 80.75,8.12 80.8,8.18 | 80.75,8.12 R9.1 | KL3.P$6 80.64,8.02 80.75,8.12
N$45  (via drill 0.3)
  Top 0.254: v59.85,15.16 59.85,16.91 58.74,18.02 JP2.2
  Bottom 0.254: U$2.6 58.95,13.79 59.85,14.68 v59.85,15.16 | v59.85,15.16
N$46  (via drill 0.3)
  Top 0.254: JP2.3 61.28,16.75 v62.71,15.32
  Bottom 0.254: U$2.21 66.83,12.14 66.67,12.3 65.88,12.3 62.87,15.32 v62.71,15.32
N$47  (via drill 0.3)
  Top 0.254: IC7.1 126.75,16.76 126.21,17.3 v126.21,18.26
  Bottom 0.254: 113.03,16.99 | U$3.13 113.03,16.99 | 113.03,16.99 112.87,17.14 112.87,16.99 | v126.21,18.26 124.94,18.26 124.14,19.05 113.82,19.05 112.87,18.1 112.87,16.99 | 112.87,16.99
N$48  (via drill 0.3)
  Top 0.254: v130.33,16.99 130.33,16.51 130.18,16.35 130.18,12.54 129.86,12.22 126.68,12.22 126.73,12.18 IC7.4
  Bottom 0.254: v130.33,16.99 130.18,16.83 130.33,16.83 130.49,16.99 125.25,16.99 123.83,18.41 114.3,18.41 113.72,17.83 U$3.14
N$49  (via drill 0.41)
  Top 0.254: IC7.8 132.07,15.88 134.46,15.88 v134.62,16.03
  Bottom 0.254: R15.1 136.6,14.57 136.6,14.61 136.05,14.61 v134.62,16.03
N$50
  Top 0.254: 141.45,14.76 | 141.45,14.76 KL6.P$3 | IC7.7 132,14.76 141.45,14.76
N$51
  Top 0.254: KL6.P$4 141.33,12.34 141.29,12.3 140.14,13.45 IC7.6
N$52
  Bottom 0.254: U$3.5 107.1,13.08 106.52,13.65 106.52,15.08 106.53,15.09 Q3.1 106.53,15.23 106.16,15.6 C17.2
N$53
  Bottom 0.254: U$3.4 107.25,12.31 106.52,11.59 106.52,10.32 | 106.52,10.32 106.53,10.31 Q3.2 | C16.2 106,9.79 106.52,10.32
N$54
  Bottom 0.254: IC9.3 125.06,15.36 125.09,15.4 125.09,14.13 124.54,13.57 120.73,13.57 120.23,13.08 U$3.20
  Bottom 0.61: IC9.3 IC9.2 | IC9.2 126.35,15.25 126.36,15.24 | 127.62,15.25 IC9.1 | IC9.2 127.62,15.25 | 127.62,15.25 127.64,15.24
N$55
  Bottom 0.254: IC9.7 119.98,15.12 120.02,15.08 120.02,14.21 119.67,13.87 U$3.19
  Bottom 0.61: IC9.7 IC9.6 | IC9.6 121.27,15.25 121.28,15.24 | IC9.6 122.38,15.25 122.4,15.24 122.41,15.25 IC9.5 123.65,15.25 123.67,15.24 123.68,15.25 IC9.4
N$56  (via drill 0.61)
  Top 1.422: v140.97,44.93 145.73,40.24
  Top 2.54: 127.79,49.21 136.84,49.21 145.73,40.24 145.73,32.15
  Bottom 1.422: 145.81,40.01 146.05,39.85 146.05,40.01 145.89,40.01 v140.97,44.93
  Bottom 2.54: REL6.S2 135.23,49.19 135.25,49.21 135.28,49.19 REL6.S1 136.87,49.19 145.81,40.01 145.81,37.31 | 145.81,37.31 146.04,37.14 X10.1 | X10.2 146.01,37.11 145.81,37.31
N$57  (via drill 0.61)
  Top 1.422: 140.65,38.1 137.64,41.12 v137.64,41.59
  Top 2.54: 140.65,31.91 140.65,37.94 140.65,38.1 | 140.65,38.1 | 140.65,38.1 135.57,44.13 127.64,44.13
  Bottom 1.422: 140.66,38.09 140.65,38.1 140.65,38.58 v137.64,41.59
  Bottom 2.54: REL6.P2 134.96,44.11 135.1,43.97 135.23,44.11 REL6.P1 135.55,44.11 135.57,44.13 140.66,38.09 X9.1 | X9.1 | X9.2 X9.1
N$58  (via drill 0.61)
  Top 1.422: v112.08,41.27 114.94,44.13 | v112.08,41.27
  Top 2.54: 108.58,37.62 108.58,31.59 | 108.58,37.62 | 108.58,37.62 114.94,44.13 122.71,44.13
  Bottom 1.422: REL5.P2 114.94,44.13 v112.08,41.27
  Bottom 2.54: 108.8,36.73 108.9,36.83 | 108.8,36.73 X11.1 108.65,37.69 114.78,44.13 116.52,44.13 REL5.P2 | X11.2 108.65,36.58 108.8,36.73 | REL5.P2 | REL5.P1 122.71,43.97 | REL5.P1 | REL5.P2 REL5.P1
N$59  (via drill 0.61)
  Top 1.422: 113.03,49.21 v108.43,44.61
  Top 2.54: 103.66,40.08 103.58,30.56 | 103.35,39.37 103.19,39.69 103.66,40.08 | 103.66,40.08 113.03,49.21 122.71,49.21 122.4,49.21
  Bottom 1.422: 113.03,49.21 113.03,49.05 112.87,49.05 v108.43,44.61 | 113.03,49.21
  Bottom 2.54: X12.2 X12.1 | X12.1 103.62,36.54 103.66,36.59 | X12.1 103.38,39.8 113.03,49.21 114.62,49.21 REL5.S2 | REL5.S2 115.09,49.05 | REL5.S2 122.53,49.19 122.56,49.21 REL5.S1
N$60
  Bottom 1.016: IC9.15 126.24,21.4 126.21,21.43 126.18,21.4 IC9.14 | IC9.15 126.33,21.31 126.36,21.27 126.49,21.4 IC9.16 | IC9.15 127.45,21.4 127.64,21.59 127.64,24.13 127.66,24.11 REL6.1 127.72,24.69 129.54,26.51 D5.A
N$61
  Bottom 1.016: IC9.10 IC9.11 | IC9.11 121.41,21.4 121.44,21.43 | IC9.11 122.37,21.4 122.4,21.43 122.43,21.4 IC9.12 123.64,21.4 123.67,21.43 123.7,21.4 IC9.13 | IC9.11 122.21,21.4 122.4,21.59 122.4,23.97 122.56,24.13 REL5.2 122.58,24.42 120.49,26.51 D6.A
N$62
  Bottom 0.254: 116.84,10.79 | 116.84,10.79 U$3.23 | 116.84,10.79 117,10.64 117.79,10.64 117.95,10.48 117.95,9.29 118.75,8.49 120.33,8.49 120.97,7.86 122.24,7.86 122.79,7.3 124.22,7.3 125.73,5.79 | KL5.P$4 125.73,5.71 125.73,5.79 | 125.73,5.79 R21.2 | 125.73,5.79
N$63
  Bottom 0.254: 115.29,7.9 U$3.25 115.29,8.77 115.41,8.89 116.36,7.94 120.02,7.94 120.65,7.3 121.6,7.3 123.19,5.71 | 123.19,5.71 KL5.P$3 | 123.19,5.71 123.27,5.71 123.19,5.64 R20.2
N$64
  Bottom 0.254: U$3.26 114.5,7.42 114.62,7.3 119.22,7.3 120.65,5.87 KL5.P$2 120.73,5.79 120.65,5.71 R19.2
N$65
  Bottom 0.254: U$3.27 113.72,7.49 114.62,6.59 117.32,6.59 118.19,5.71 | 118.19,5.71 KL5.P$1 | 118.19,5.71 118.27,5.71 R18.2
N$66
  Bottom 0.254: R17.1 128.11,8.26 128.15,8.21 KL5.P$5
N$67
  Bottom 0.254: 130.75,8.2 130.81,8.26 | 130.75,8.2 R16.1 | KL5.P$6 130.65,8.1 130.75,8.2
N$68  (via drill 0.3)
  Top 0.254: v109.86,15.24 109.86,16.99 108.74,18.1 JP3.2
  Bottom 0.254: U$3.6 108.96,13.87 109.86,14.76 v109.86,15.24 | v109.86,15.24
N$69  (via drill 0.3)
  Top 0.254: JP3.3 111.28,16.83 v112.71,15.4
  Bottom 0.254: 116.84,12.22 | 116.84,12.22 U$3.21 | 116.84,12.22 116.68,12.38 115.89,12.38 112.87,15.4 v112.71,15.4
N$70  (via drill 0.3)
  Top 0.254: IC10.1 176.76,16.84 176.21,17.38 v176.21,18.34
  Bottom 0.254: 163.03,17.07 163.04,17.07 | U$4.13 163.03,17.07 | 163.03,17.07 162.88,17.22 162.88,17.07 | v176.21,18.34 174.94,18.34 174.15,19.13 163.83,19.13 162.88,18.18 162.88,17.07 | 162.88,17.07
N$71  (via drill 0.3)
  Top 0.254: v180.34,17.07 180.34,16.59 180.18,16.43 180.18,12.62 179.86,12.3 176.69,12.3 176.73,12.26 IC10.4
  Bottom 0.254: v180.34,17.07 180.18,16.91 180.34,16.91 180.5,17.07 175.26,17.07 173.83,18.49 164.31,18.49 163.72,17.91 U$4.14
N$72  (via drill 0.41)
  Top 0.254: IC10.8 182.07,15.95 184.47,15.95 v184.63,16.11
  Bottom 0.254: R22.1 186.61,14.65 186.61,14.68 186.06,14.68 v184.63,16.11
N$73
  Top 0.254: KL8.P$3 191.45,14.84 182,14.84 IC10.7
N$74
  Top 0.254: KL8.P$4 191.33,12.42 191.29,12.38 190.15,13.53 IC10.6
N$75
  Bottom 0.254: U$4.5 157.1,13.16 156.53,13.73 156.53,15.16 156.53,15.17 Q4.1 156.53,15.31 156.16,15.68 C23.2
N$76
  Bottom 0.254: U$4.4 157.25,12.39 156.53,11.67 156.53,10.4 | 156.53,10.4 156.53,10.39 Q4.2 | C22.2 156,9.87 156.53,10.4
N$77
  Bottom 0.254: IC12.3 175.06,15.44 175.1,15.48 175.1,14.21 174.55,13.65 170.74,13.65 170.24,13.16 U$4.20
  Bottom 0.61: IC12.3 IC12.2 | IC12.2 176.36,15.33 176.37,15.32 | 177.63,15.33 IC12.1 | IC12.2 177.63,15.33 | 177.63,15.33 177.64,15.32
N$78
  Bottom 0.254: IC12.7 169.98,15.2 170.02,15.16 170.02,14.29 169.68,13.94 U$4.19
  Bottom 0.61: IC12.7 IC12.6 | IC12.6 171.28,15.33 171.29,15.32 | IC12.6 172.39,15.33 172.4,15.32 172.42,15.33 IC12.5 173.66,15.33 173.67,15.32 173.69,15.33 IC12.4
N$79  (via drill 0.61)
  Top 1.422: v190.98,45.01 195.74,40.32
  Top 2.54: 177.8,49.29 186.85,49.29 195.74,40.32 195.74,32.23
  Bottom 1.422: 195.82,40.08 196.06,39.93 196.06,40.08 195.9,40.08 v190.98,45.01
  Bottom 2.54: REL8.S2 185.24,49.27 185.26,49.29 185.28,49.27 REL8.S1 186.87,49.27 195.82,40.08 195.82,37.39 | 195.82,37.39 196.04,37.22 X14.1 | X14.2 196.02,37.19 195.82,37.39
N$80  (via drill 0.61)
  Top 1.422: 190.66,38.18 187.64,41.2 v187.64,41.67
  Top 2.54: 190.66,31.99 190.66,38.02 190.66,38.18 | 190.66,38.18 | 190.66,38.18 185.58,44.21 177.64,44.21
  Bottom 1.422: 190.67,38.17 190.66,38.18 190.66,38.66 v187.64,41.67
  Bottom 2.54: REL8.P2 184.97,44.19 185.1,44.05 185.24,44.19 REL8.P1 185.56,44.19 185.58,44.21 190.67,38.17 X13.1 | X13.1 190.66,37.23 | X13.1 X13.2
N$81  (via drill 0.61)
  Top 1.422: v162.08,41.35 164.94,44.21 | v162.08,41.35
  Top 2.54: 158.59,37.7 158.59,31.67 | 158.59,37.7 | 158.59,37.7 164.94,44.21 172.72,44.21
  Bottom 1.422: REL7.P2 164.94,44.21 v162.08,41.35
  Bottom 2.54: 158.81,36.81 158.91,36.91 | 158.81,36.81 X15.1 158.66,37.77 164.78,44.21 166.53,44.21 REL7.P2 | X15.2 158.66,36.66 158.81,36.81 | REL7.P2 | REL7.P1 172.72,44.05 | REL7.P1 | REL7.P2 REL7.P1
N$82  (via drill 0.61)
  Top 1.422: v158.43,44.69 163.04,49.29 | v158.43,44.69
  Top 2.54: 153.67,40.16 153.59,30.64 | 153.35,39.45 153.19,39.77 153.67,40.16 | 153.67,40.16 163.04,49.29 172.72,49.29 172.4,49.29
  Bottom 1.422: 163.04,49.29 163.04,49.13 162.88,49.13 v158.43,44.69 | 163.04,49.29
  Bottom 2.54: X16.2 X16.1 | X16.1 153.62,36.62 153.67,36.67 | X16.1 153.38,39.88 163.04,49.29 164.62,49.29 REL7.S2 | REL7.S2 165.1,49.13 | REL7.S2 172.54,49.27 172.56,49.29 REL7.S1
N$83
  Bottom 1.016: IC12.15 176.24,21.48 176.21,21.51 176.18,21.48 IC12.14 | IC12.15 176.33,21.39 176.37,21.35 176.5,21.48 IC12.16 | IC12.15 177.45,21.48 177.64,21.67 177.64,24.21 177.66,24.19 REL8.1 177.72,24.77 179.55,26.59 D7.A
N$84
  Bottom 1.016: IC12.10 IC12.11 | IC12.11 171.42,21.48 171.45,21.51 | IC12.11 172.37,21.48 172.4,21.51 172.43,21.48 IC12.12 173.64,21.48 173.67,21.51 173.7,21.48 IC12.13 | IC12.11 172.21,21.48 172.4,21.67 172.4,24.05 172.56,24.21 REL7.2 172.59,24.5 170.5,26.59 D8.A
N$85
  Bottom 0.254: 166.85,10.87 | U$4.23 166.85,10.87 | 166.85,10.87 167,10.72 167.8,10.72 167.96,10.56 167.96,9.37 168.75,8.57 170.34,8.57 170.97,7.94 172.24,7.94 172.8,7.38 174.23,7.38 175.74,5.87 | KL7.P$4 175.74,5.79 175.74,5.87 | R28.2 175.74,5.87
N$86
  Bottom 0.254: 165.3,7.98 U$4.25 165.3,8.85 165.42,8.97 166.37,8.02 170.02,8.02 170.66,7.38 171.61,7.38 173.2,5.79 | 173.2,5.79 KL7.P$3 | 173.2,5.79 173.28,5.79 173.2,5.71 R27.2
N$87
  Bottom 0.254: U$4.26 164.51,7.5 164.62,7.38 169.23,7.38 170.66,5.95 KL7.P$2 170.74,5.87 170.66,5.79 R26.2
N$88
  Bottom 0.254: U$4.27 163.72,7.57 164.62,6.67 167.32,6.67 168.2,5.79 | 168.2,5.79 KL7.P$1 | 168.2,5.79 168.28,5.79 R25.2
N$89
  Bottom 0.254: R24.1 178.12,8.33 178.16,8.29 KL7.P$5
N$90
  Bottom 0.254: 180.76,8.28 180.82,8.33 | 180.76,8.28 R23.1 | KL7.P$6 180.66,8.18 180.76,8.28
N$91  (via drill 0.3)
  Top 0.254: v159.86,15.32 159.86,17.07 158.75,18.18 JP4.2
  Bottom 0.254: U$4.6 158.96,13.94 159.86,14.84 v159.86,15.32
N$92  (via drill 0.3)
  Top 0.254: JP4.3 161.29,16.91 v162.72,15.48
  Bottom 0.254: U$4.21 166.85,12.3 166.69,12.46 165.89,12.46 162.88,15.48 v162.72,15.48